# Altium PCB Fly-Balance.PcbDoc (part 2 of 2)
Units mil, origin at the board's own origin, x right, y up, seen from the top; angles counter-clockwise.
Board outline 1574.8 x 1574.8 mil, 2 copper layers (Top Layer, Bottom Layer); 114 components, 74 nets, 393 pads, 405 vias.
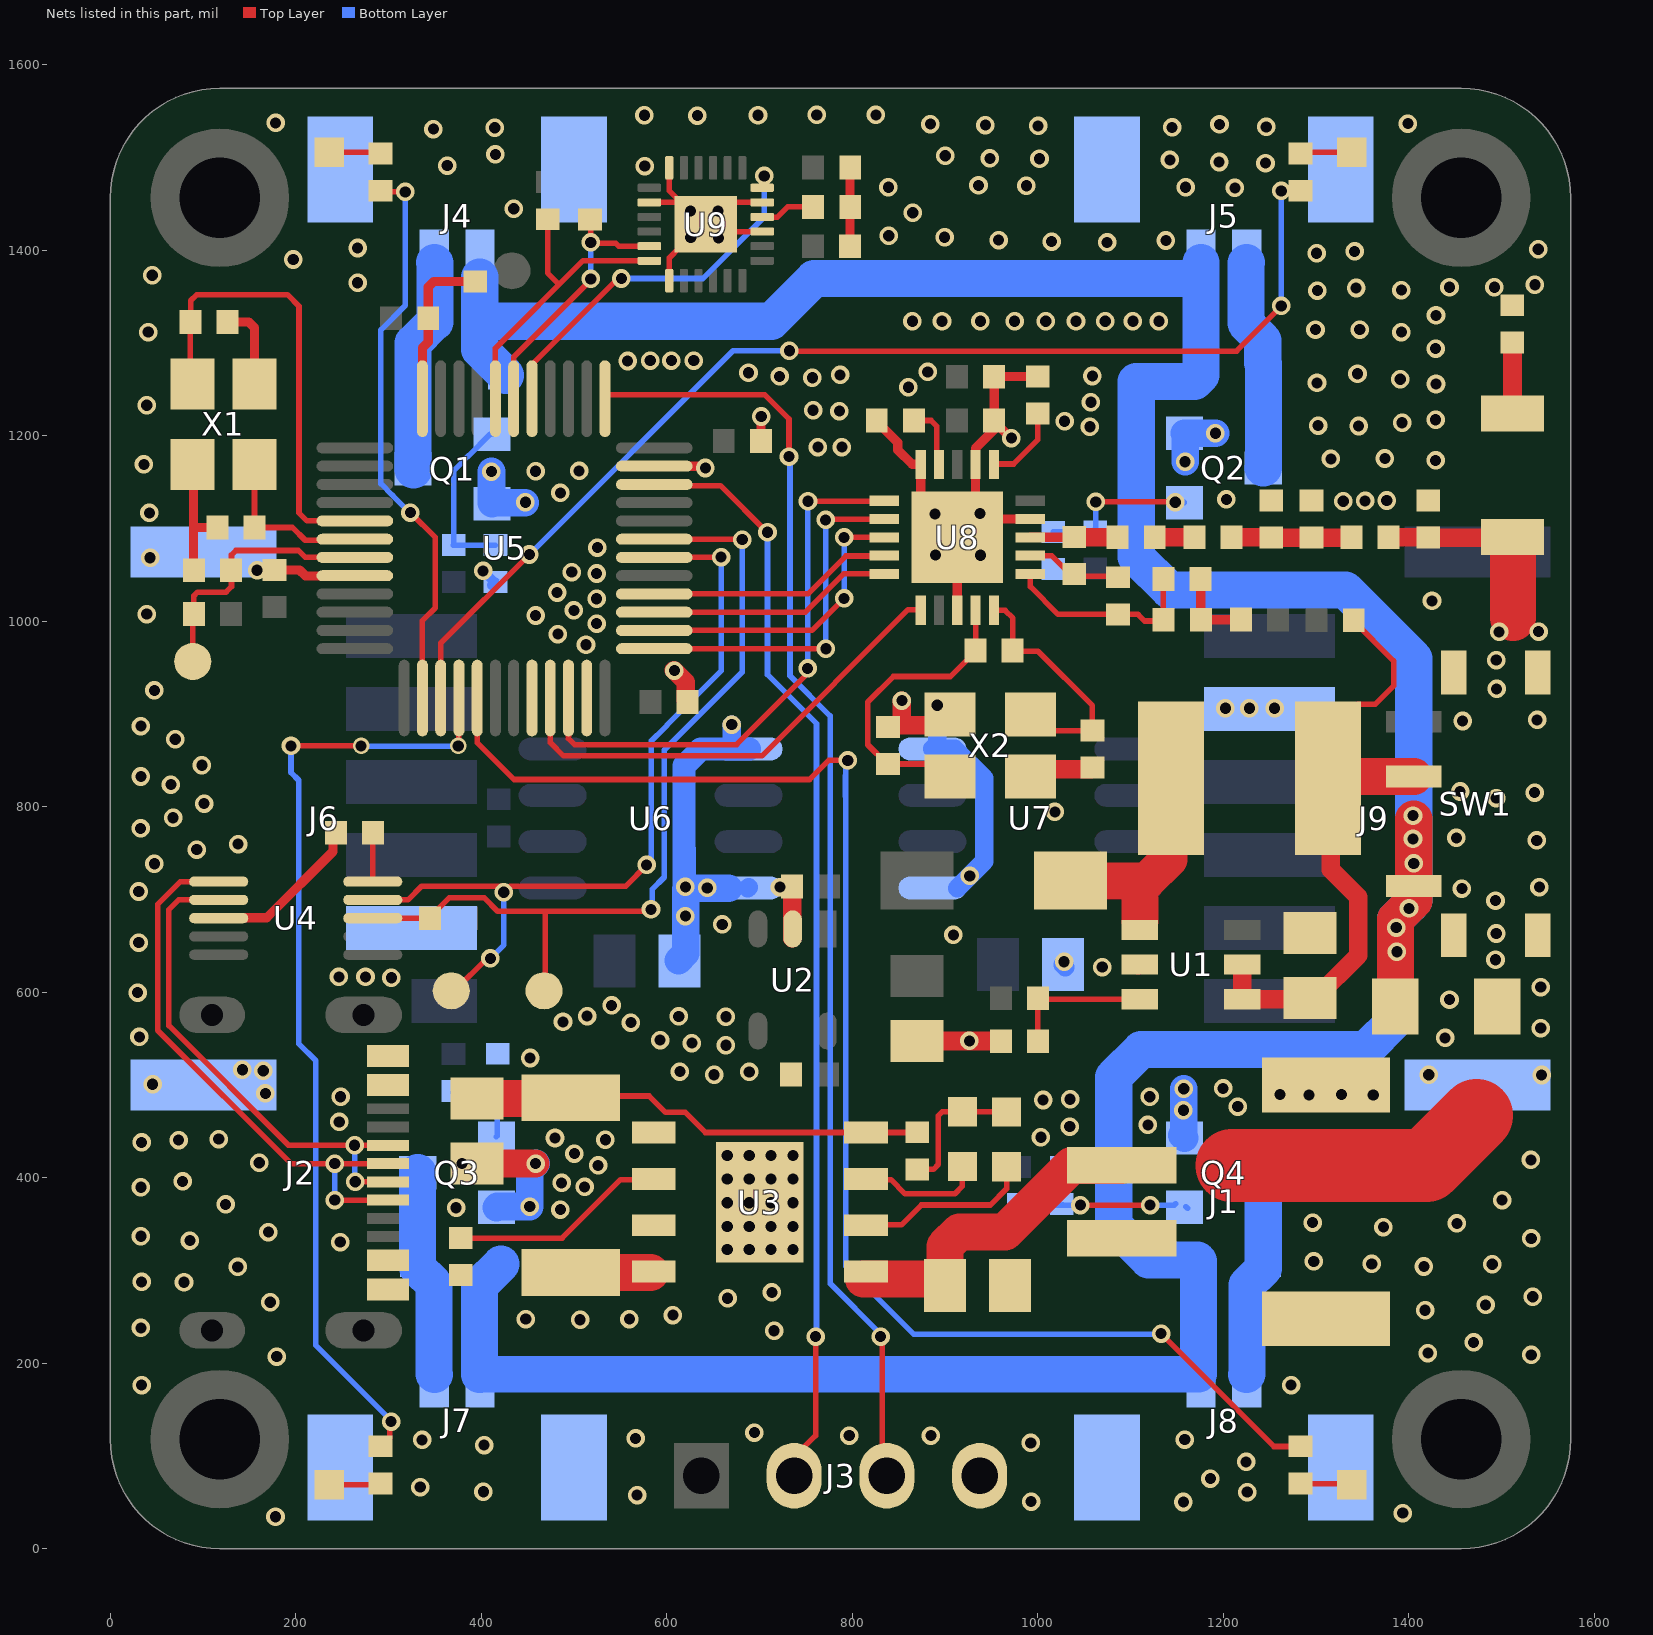
[diagram p2: the nets of this part, all layers, seen from the top]

## Via types
v1: diameter 20, hole 12, Top Layer to Bottom Layer, tented both sides, 403 vias
v2: diameter 18, hole 12, Top Layer to Bottom Layer, tented both sides, 2 vias

## Nets (pads, with @x,y where several pads share a name; then routed paths per layer and width w, separated by ;. In a path a pad name is that pad's centre, name@x,y a point inside that pad or via, vN(x,y) a via of type N, cw(c..) or ccw(c..) an arc to the next point about the centre after c; other vN are vias at no path point) (continued)
GND: ANT1.1 C1.2 C2.2 C3.2 C4.2 C5.2 C6.2 C7.2 C8.1 C9.1 C10.1 C11.1 C12.1 C13.1 C14.1 C17.2 C19.2 C23.1 C24.2 C25.2 C27.1 C28.2 C29.2 C30.1 C31.1 C32.2 C33.1 C34.2 J1.0 J1.1 J2.A1B12 J2.B1A12 J3.4 J4.0 J5.0 J6.2 J6.7 J6.8 J7.0 J8.0 J9.2 J9.8 L3.2 L5.1 L6.1 L6.2 Q1.2 Q2.2 Q3.2 Q4.2 R3.1 R4.1 R7.1 R9.2 R19.2 R20.2 R23.2 R24.2 R25.1 R26.2 SW1.0 U1.2 U2.2 U3.1 U3.3 U3.9 U4.3 U5.8 U5.20 U5.23 U5.35 U5.47 U6.5 U6.8 U7.5 U7.8 U8.8 U8.14 U8.17 U8.20 U8.21 U9.1 U9.9 U9.11 U9.18 U9.20 U9.25 X1.2 X1.4 X2.2 X2.4 | length 3118.8
  Top Layer w6: U9.20@581.3,1451.77 617.13,1451.77 U9.25@617.72,1451.18 ; U9.1@602.76,1367.32 602.9,1367.46 602.9,1392.07 613.98,1403.15 U9.25@614.57,1403.15 ; U9.18@602.76,1488.98 602.9,1488.83 602.9,1464.23 613.39,1453.74 U9.25@613.39,1452.76 ; U9.25@665.75,1418.9 667.13,1420.28 U9.9@702.95,1420.28 ; U9.25@669.69,1453.94 671.85,1451.77 U9.11@702.95,1451.77
  Top Layer w10: C14.1@88,1056 89.76,1057.76 X1.2@89.76,1167.72 ; X1.2@88.58,1169.29 X1.2@88.58,1179.13 ; 90,1101.18 C13.1@115.43,1101.18 ; U4.3@114.96,680.32 168.73,680.32 240.2,751.79 240.2,768.86 C7.2@243.39,772.05 ; U4.3@116.9,679.92 U4.3@117.09,680.11 ; C12.1@126.3,1322.83 149.21,1322.83 155.51,1316.54 X1.4@155.51,1256.3 ; X1.4@154.72,1245.28 154.72,1255.12 X1.4@155.51,1255.91 X1.4@155.91,1256.3 ; v1(158.27,1055.12) 158.43,1055.28 177.01,1055.28 C8.1@177.17,1055.43 204.02,1055.43 210.63,1048.82 210.68,1048.87 256.74,1048.87 U5.8@257.09,1049.21 ; U5.47@336.61,1240.16 336.61,1294.49 ; 336.61,1294.88 342.83,1301.1 C11.1@342.83,1326.77 ; C11.1@342.91,1326.77 342.91,1360.6 348.77,1366.46 R9.2@393.7,1366.46 ; U5.20@454.53,917.52 U5.20@454.72,917.32 ; U5.35@586.42,1167.52 U5.35@586.61,1167.32 639.76,1167.32 v1(641.73,1165.35) ; C10.1@701.5,1194.49 701.73,1194.72 701.73,1221.1 v1@701.57,1221.26 ; C32.2@797.95,1489.37 797.76,1489.17 797.76,1403.82 C33.1@798.03,1403.54 ; C23.1@825.59,1216.93 825.59,1216.42 849.27,1192.74 849.27,1184.76 864.78,1169.25 U8.20@873.99,1169.25 873.99,1133.83 U8.21@873.62,1133.46 ; U8.21@912.99,1049.21 913.39,1048.82 U8.8@913.39,1011.85 ; U8.17@933.09,1169.25 933.07,1186.68 953.94,1207.54 C24.2@953.94,1209.84 ; U8.17@933.09,1169.25 933.09,1127.94 U8.21@934.65,1126.38 ; U8.21@947.64,1110.63 948.02,1110.25 U8.14@992.09,1110.25 ; C24.2@951.97,1217.32 953.07,1218.43 C25.2@953.07,1263.78 ; C24.2@952.36,1216.54 952.36,1216.26 970.98,1197.64 v1(971.65,1197.64) ; C25.2@953.54,1263.78 953.7,1263.94 999.84,1263.94 R25.1@1000,1264.09 ; C29.2@1175.2,1001.97 1175.39,1001.77 C29.2@1175.71,1001.77 ; C28.2@1175.59,1046.06 1175.71,1045.94 C29.2@1175.71,1001.77 ; R4.1@1219.29,1001.97 1219.09,1001.77 C29.2@1175.71,1001.77
  Top Layer w20: v1@607.89,947.24 620.55,934.58 620.55,914.8 C9.1@622.05,913.31 ; C9.1@622.05,913.39 C9.1@622.05,913.31 ; C9.1@622.36,912.99 C9.1@622.05,913.31 ; C2.2@733.46,716.54 735.43,714.57 735.43,714.17 U2.2@735.43,658.27 ; v1(853.54,914.57) 853.54,887.95 893.07,887.95 X2.4@905.51,900.39 ; C1.2@870.08,547.68 870.3,547.46 959.63,547.46 R3.1@959.84,547.24 ; X2.4@905.51,899.61 X2.4@912.39,899.61 ; X2.2@988.58,830.32 X2.2@991.73,833.46 ; X2.2@996.46,839.37 997.48,840.39 1057.24,840.39 C31.1@1059.06,842.2 ; U1.2@1108.23,629.09 U1.2@1109.45,630.32 ; U1.2@1110.23,629.92 U1.2@1110.63,629.53 ; C4.2@1292.13,665.32 C4.2@1293.7,663.74 ; L3.2@1378.27,1090.55 L6.2@1421.65,1090.55 ; L6.2@1421.26,1090.24 1510.31,1090.24 ANT1.1@1511.02,1090.94
  Top Layer w30: C5.2@395.67,415.39 458.62,415.39 v1(458.66,415.35) ; X2.2@992.52,833.07 X2.2@993.7,834.25
  Top Layer w50: 1512.6,1003.94 ANT1.1@1512.6,1081.04
  Bottom Layer w10: v1(401.97,1054.33) 402.25,1054.33 414.37,1042.2 R19.2@415.35,1042.2 ; R19.2@411.1,1039.06 R19.2@411.42,1039.37 ; R19.2@411.42,1039.06 R19.2@412.4,1039.06
  Bottom Layer w20: v1(670.08,888.58) 670.08,865.8 673.48,862.4 U6.5@688.29,862.4 ; U6.8@687.4,712.2 U6.8@688.58,713.39 ; U7.8@886.52,862.4 U7.8@889.51,862.4 ; v1(891.73,909.45) 891.73,864.62 U7.8@889.51,862.4 ; U7.5@913.39,712.2 v1(926.77,725.59) 942.52,741.34 942.52,830.71 910.83,862.4 U7.8@889.51,862.4 ; C19.2@1027.13,629.92 C19.2@1029.88,627.17
  Bottom Layer w25: v1@619.29,712.2 618.85,712.65 618.85,754.18 618.74,754.28 618.74,844.33 636.61,862.2 U6.5@689.37,862.2 ; v1@620.47,711.02 v1@623.43,708.07
  Bottom Layer w30: v1(411.02,1161.42) 411.02,1127.54 Q1.2@411.59,1126.97 412.58,1127.95 v1@447.24,1127.95 ; Q3.2@416.52,368.11 417.3,368.9 v1(452.36,368.9) 452.36,408.66 v1@459.06,415.35 ; C17.2@612.6,634.25 620.47,642.13 v1@620.47,711.02 ; v1@623.43,708.07 627.56,712.2 U6.8@666.57,712.2 ; Q4.2@1155.29,445.91 Q4.2@1157.48,443.72 ; v1(1157.48,496.06) Q4.2@1157.48,443.72 ; Q4.2@1158.29,442.91 Q4.2@1157.48,443.72 ; v1(1159.06,1172.05) 1159.06,1201.99 Q2.2@1158.29,1202.76 v1(1191.73,1202.76)
  other v1: 178.15,34.45 1393.7,38.39 1157.09,50.39 992.91,50.79 568.11,57.87 402.36,61.42 1225.98,61.02 334.25,66.54 1186.22,75.59 1224.8,93.7 403.15,111.81 992.52,114.17 336.22,117.32 1158.66,117.72 566.54,118.9 796.85,122.05 884.84,122.05 694.49,125.2 33.86,176.38 1273.23,176.38 179.53,207.09 1532.28,209.06 1420.87,211.02 1470.08,222.44 715.75,235.04 33.07,238.19 506.69,246.85 448.03,247.64 559.84,247.64 606.69,251.97 1417.72,257.09 1483.07,262.99 172.44,265.75 665.75,270.08 1533.86,271.65 713.39,276.38 79.53,287.4 33.86,287.8 137.4,303.94 1416.54,304.33 1360.24,307.09 1490.16,306.69 1297.64,309.84 665.35,322.83 688.98,322.83 712.6,322.83 736.22,322.83 248.03,330.71 85.83,332.28 1532.28,334.65 33.07,337.01 170.47,341.34 665.35,347.44 688.98,347.44 712.6,347.44 736.22,347.44 1372.83,346.85 1296.46,351.57 1451.97,350.79 485.43,365.75 372.83,367.72 124.41,371.26 665.35,373.03 688.98,373.03 712.6,373.03 736.22,373.03 1500.79,375.98 33.07,389.76 511.42,390.16 486.61,394.49 77.95,396.06 665.35,398.62 688.98,398.62 712.6,398.62 736.22,398.62 525.98,413.39 379.13,415.35 160.63,416.14 1531.89,419.29 665.35,424.21 688.98,424.21 712.6,424.21 736.22,424.21 500.39,425.98 33.86,438.19 73.62,440.55 533.86,440.94 116.93,441.73 479.53,442.91 1003.54,443.7 1034.65,455.12 1118.9,457.09 246.85,460.24 1157.09,472.83 1215.75,476.77 1005.91,483.86 1035.04,484.65 248.43,487.4 1120.87,487.4 1292.52,489.37 1361.81,489.37 1261.42,489.76 1327.56,489.76 167.32,490.94 1200,496.46 45.67,500.79 651.18,511.02 1421.65,511.02 1543.31,510.83 614.17,514.57 688.98,514.17 164.96,515.35 142.52,516.54 452.76,529.13 663.78,542.91 627.17,545.28 592.91,548.43 926.38,547.64 1439.37,550.79 31.5,551.97 1542.52,561.42 561.42,567.32 488.19,568.11 514.17,574.41 612.99,574.02 663.78,573.62 540.55,585.83 1444.09,592.13 29.53,599.61 1542.52,605.51 246.46,616.54 275.2,616.54 303.15,615.75 1069.69,627.17 1028.54,632.87 1493.7,635.04 30.71,653.54 909.06,661.81 1494.49,663.39 659.84,673.23 620.08,682.09 1493.7,698.82 30.71,708.66 1457.48,711.81 620.08,713.58 643.7,712.6 722.05,713.39 1540.94,713.39 47.64,738.58 93.31,753.94 137.8,759.84 1538.19,763.78 1451.57,766.54 32.68,776.77 67.72,788.19 1018.5,794.49 101.18,803.54 1494.49,809.45 1535.83,815.35 1455.51,816.54 65.35,824.02 33.07,832.68 98.82,844.88 70.08,872.83 33.07,887.01 1458.27,892.52 1538.58,893.7 1202.36,906.3 1228.35,906.3 1255.51,906.3 47.64,925.59 1494.88,927.17 608.27,946.85 1494.49,958.27 512.99,974.8 482.68,986.22 1497.64,988.58 1540.16,988.98 524.41,997.64 458.66,1006.3 39.37,1007.87 500,1011.81 1425.2,1022.05 524.41,1024.41 481.89,1031.1 524.41,1051.57 497.64,1053.15 42.91,1068.5 938.19,1071.26 889.76,1071.65 525.2,1079.53 889.37,1115.75 937.8,1116.14 42.13,1116.93 447.64,1128.35 1329.53,1129.53 1353.15,1129.92 1376.38,1130.32 1203.54,1131.5 485.43,1138.58 458.66,1161.81 505.51,1162.2 36.22,1169.29 1429.13,1173.62 1316.14,1175.2 1374.41,1175.59 762.99,1187.8 788.98,1187.8 1056.3,1209.84 1302.36,1211.02 1346.06,1210.63 1392.91,1214.17 1029.13,1215.75 1429.13,1217.32 701.97,1220.87 757.87,1227.56 786.22,1226.77 39.37,1233.07 1057.48,1236.22 860.63,1252.36 1429.53,1255.91 1301.18,1257.09 1390.94,1261.02 757.09,1262.6 721.65,1264.17 1059.06,1264.57 787.01,1265.75 1344.88,1266.93 688.19,1268.11 881.5,1268.9 557.87,1280.71 582.28,1281.1 605.12,1281.1 629.13,1281.1 1429.13,1294.09 40.94,1311.81 1392.13,1311.81 1299.61,1314.57 1347.24,1314.57 864.96,1323.62 896.85,1323.62 938.19,1323.62 975.2,1323.62 1008.66,1323.62 1041.34,1323.62 1072.83,1323.62 1102.76,1323.62 1130.71,1323.62 1429.53,1329.92 1301.57,1356.69 1392.13,1357.09 1343.31,1359.45 1444.09,1360.24 1492.52,1360.24 1536.22,1362.99 266.73,1365.16 45.28,1373.23 197.24,1390.16 1300.79,1396.85 1341.73,1398.82 1539.76,1401.18 266.73,1402.56 1014.96,1409.45 1074.8,1408.66 957.87,1411.02 1138.19,1410.63 655.91,1413.39 625.98,1413.78 899.61,1414.17 839.37,1415.75 865.35,1440.55 625.59,1442.52 655.51,1442.52 435.04,1444.88 1212.6,1467.32 838.98,1468.11 1159.45,1468.11 936.22,1470.08 987.8,1469.69 363.39,1491.34 576.38,1490.94 1245.67,1494.09 1195.67,1495.28 1142.52,1497.64 948.43,1499.21 1001.97,1498.82 900.39,1501.97 415.35,1503.54 348.43,1530.71 414.57,1532.28 1144.88,1532.68 1246.46,1533.07 1000.39,1534.25 943.7,1535.04 884.25,1536.22 1196.06,1535.83 178.35,1537.4 1399.21,1536.61 633.07,1545.28 575.98,1545.67 698.43,1545.67 761.81,1546.06 825.59,1546.06
I2C_SCL: R10.1 U5.42 U9.23 | length 283.6
  Top Layer w6: U5.42@435.04,1240.16 435.04,1285.04 518.11,1368.11 v1@518.11,1368.5 ; R10.1@517.32,1428.43 518.5,1427.24 518.11,1426.85 v1(518.11,1408.66) ; v1@518.9,1408.27 519.69,1407.48 545.28,1407.48 548.23,1404.53 U9.23@581.3,1404.53 U9.23@580.71,1405.12
  Bottom Layer w6: v1@517.72,1404.72 518.11,1404.33 v1(518.11,1369.29)
I2C_SDA: R11.1 U5.43 U9.24 | length 335.1
  Top Layer w6: U5.43@414.96,1239.37 415.35,1239.76 U5.43@415.35,1240.16 415.35,1294.49 509.84,1388.98 581.1,1388.98 U9.24@581.3,1388.78 ; R11.1@471.65,1433.54 471.65,1375.59 483.46,1363.78
LED_LB: R15.1 U5.16 | length 1038.4
  Top Layer w6: v1(194.88,865.75) v2(270.47,865.75) ; R15.1@291.34,110.55 292.32,110.55 301.13,119.36 301.13,134.2 v1@303.15,136.22 ; v2(375.2,865.75) 375.59,866.14 375.59,916.93 U5.16@375.98,917.32 U5.16@376.18,917.13
  Bottom Layer w6: v1(194.88,865.75) 194.88,837.01 203.25,828.64 203.25,651.58 203.15,651.48 203.15,544.71 221.65,526.2 221.65,219.29 285.83,155.12 285.83,155.06 303.15,137.74 v1@303.15,136.22 ; v2(270.47,865.75) 271.66,865.75 272.05,865.35 374.8,865.35 v2(375.2,865.75)
  other v1: 302.76,137.01
LED_LF: R13.1 U5.14 | length 609.3
  Top Layer w6: R13.1@292.91,1465.35 292.52,1464.96 294.49,1462.99 v1(318.11,1462.99) ; v1@324.02,1118.11 324.02,1116.93 350.5,1090.45 350.5,1014.67 336.61,1000.79 U5.14@336.61,917.32
  Bottom Layer w6: v1(318.11,1462.99) 318.11,1340.55 291.73,1314.17 291.73,1148.5 304.41,1135.83 304.41,1135.75 318.35,1121.81 319.84,1121.81 v1@319.69,1121.65
  other v1: 323.62,1117.32
LED_RB: R16.1 U5.17 | length 1592
  Top Layer w6: U5.17@395.67,917.32 395.67,869.3 435.54,829.42 753.98,829.42 774.56,850 v1(795.27,850) ; v1(1133.07,231.89) 1254.72,110.24 R16.1@1284.65,110.24
  Bottom Layer w6: v1(795.27,850) 792.98,847.7 792.98,833.63 792.81,833.46 792.81,811.52 792.91,811.42 792.91,304.72 866.54,231.1 1132.28,231.1 v1(1133.07,231.89)
LED_RF: R14.1 U5.15 | length 1259.3
  Top Layer w6: U5.15@356.3,917.32 356.3,976.38 v1(451.97,1072.05) ; v1(732.28,1291.73) 732.68,1291.34 1214.57,1291.34 1262.6,1339.37 v1(1262.6,1340.16) ; v1(1262.6,1464.17) R14.1@1281.5,1464.17
  Bottom Layer w6: v1(451.97,1072.05) 671.65,1291.73 v1(732.28,1291.73) ; v1(1262.6,1340.16) v1@1262.6,1463.78
MPU_INT: U5.41 U9.12 | length 386.4
  Top Layer w6: U5.41@454.33,1255.12 454.33,1276.59 546.74,1369 549.61,1366.14 v1@545.28,1366.14
  Bottom Layer w6: v1(551.18,1369.69) 639.07,1369.69 705.12,1435.73 v1(705.12,1480.32)
NetANT1_2: ANT1.2 R26.1 | length 77
  Top Layer w20: ANT1.2@1512,1224.27 R26.1@1512,1301
  Top Layer w25: ANT1.2@1511.81,1224.08 ANT1.2@1512,1224.27
NetC4_1: C4.1 L1.1 R2.2 SW1.2 U1.4 U1.5 | length 646.1
  Top Layer w6: L1.1@1338.19,903.54 1345.03,910.39 1363.93,910.39 1383.86,930.32 1383.86,957.2 1340.87,1000.2 R2.2@1340.87,1001.18
  Top Layer w10: L1.1@1315.75,856.3 L1.1@1315.75,880.71
  Top Layer w20: U1.4@1220.47,592.52 U1.5@1220.47,629.92 ; U1.4@1233.46,592.52 1294.88,592.52 1295.28,592.91 1301.14,592.91 C4.1@1303.15,594.92 ; C4.1@1293.7,593.74 1299.61,593.74 1345.67,639.8 1345.67,702.76 1316.14,732.28 1316.14,828.35 L1.1@1312.99,831.5
  Top Layer w40: L1.1@1313.78,833.07 1314.17,832.68 SW1.2@1405.51,832.68
NetC7_1: C7.1 U4.10 | length 52.5
  Top Layer w6: U4.10@283.1,719.71 283.1,771.76 C7.1@283.39,772.05
NetC15_2: C15.2 D2.1 J4.1 Q1.3 | length 233.3
  Bottom Layer w40: Q1.3@326.77,1163.39 326.52,1163.64 D2.1@326.52,1263.78 326.52,1299.94 C15.2@349.41,1322.83 ; J4.1@349.42,1386.81 350,1386.22 C15.2@350,1322.83
NetC16_2: C16.2 D3.1 J5.2 Q2.3 | length 227.2
  Bottom Layer w40: C16.2@1224.8,1321.65 1224.8,1386.22 J5.2@1225.39,1386.81 ; C16.2@1225.98,1319.69 1236.42,1309.25 ; 1236.22,1309.45 1242.74,1302.93 1242.74,1278.79 1243.31,1278.22 Q2.3@1243.29,1165.35
NetC20_2: C20.2 D4.1 J7.2 Q3.3 | length 221.7
  Bottom Layer w40: D4.1@331.1,304.33 331.1,303.15 349.21,285.04 C20.2@349.21,253.15 ; D4.1@331.1,306.69 331.1,405.1 Q3.3@331.52,405.51 ; C20.2@349.21,251.97 349.21,188.2 J7.2@349.42,188
NetC21_2: C21.2 D5.1 J8.1 Q4.3 | length 223.4
  Bottom Layer w40: J8.1@1225.39,188 1225.59,188.2 C21.2@1225.59,257.09 ; C21.2@1225.59,258.66 1225.59,284.39 1243.31,302.11 D5.1@1243.31,312.2 ; D5.1@1243.29,312.22 Q4.3@1243.29,405.51
NetC23_2: C23.2 U8.19 | length 69.1
  Top Layer w6: C23.2@866.46,1216.54 885.04,1216.54 891.34,1210.24 891.34,1170.87 U8.19@892.91,1169.29
NetC26_1: C26.1 L2.2 | length 43.1
  Top Layer w20: L2.2@1126.3,1090.55 1168.34,1090.55 ccw(c1168.34,1091.9) C26.1@1169.29,1090.94
NetC26_2: C26.2 C27.2 L3.1 L5.2 | length 129.8
  Top Layer w20: C26.2@1208.98,1090.55 1250.85,1090.55 ccw(c1250.85,1093.24) C27.2@1252.76,1091.34 ; C27.2@1251.97,1090.24 1294.57,1090.24 L5.2@1296.06,1091.73 ; L5.2@1295.28,1090.24 1335.08,1090.24 cw(c1335.08,1088.62) L3.1@1336.22,1089.76
NetC28_1: C28.1 C29.1 L7.2 U8.11 | length 217.6
  Top Layer w6: U8.11@992.13,1051.57 992.13,1037.4 1021.97,1007.56 L7.2@1086.61,1007.56 1108.19,1007.56 1115.35,1000.39 1134.25,1000.39 C29.1@1135.83,1001.97 ; C29.1@1135.43,1001.97 1135.51,1002.05 C28.1@1135.51,1045.67
NetC30_2: C30.2 R27.1 U8.9 X2.1 | length 316.3
  Top Layer w6: X2.1@895.67,846.46 895.35,846.14 C30.2@838.58,846.14 837.6,846.14 816.79,866.95 816.79,912.85 844.49,940.55 905.79,940.55 932.28,967.05 R27.1@932.28,969.69 ; R27.1@933.09,969.7 U8.9@933.09,1011.85
NetC31_2: C31.2 R27.2 U8.10 X2.3 | length 270.3
  Top Layer w6: U8.10@952.79,1011.85 964.92,1011.85 973.23,1003.54 R27.2@973.23,969.29 ; R27.2@972.44,967.72 1000.39,967.72 1059.06,909.06 C31.2@1059.06,882.2 1008.74,882.2 X2.3@991.73,899.21
NetC34_1: C34.1 U9.10 | length 59.3
  Top Layer w6: U9.10@703.15,1435.83 719.29,1435.83 730.32,1446.85 C34.1@757.87,1446.85
NetD1_1: D1.1 L1.2 U1.1 | length 248.1
  Top Layer w40: D1.1@1037.4,720.47 1037.8,720.08 1117.91,720.08 ; U1.1@1110.24,677.17 1110.24,712.41 1117.91,720.08 ; L1.2@1143.7,830.71 1141.34,828.35 1141.34,743.51 1117.91,720.08
NetL2_1: L2.1 L4.2 U8.13 | length 94.4
  Top Layer w10: U8.13@992.24,1090.71 U8.13@992.09,1090.55 1038.42,1090.55 cw(c1038.42,1089.21) L4.2@1039.37,1090.16 ; L4.2@1039.21,1090.71 L4.2@1039.37,1090.55
  Top Layer w20: L4.2@1039.37,1090.87 1085.51,1090.87 L2.1@1085.83,1090.55
NetL4_1: L4.1 L7.1 U8.12 | length 104.1
  Top Layer w6: U8.12@992.09,1070.85 1014.99,1070.87 ; 1014.98,1070.85 1035.43,1050.39 L4.1@1038.98,1050.39 ; L4.1@1039.37,1050.87 1041.81,1048.43 L7.1@1087.01,1048.43
NetLED1_1: LED1.1 LED2.1 R6.1 | length 152.2
  Top Layer w6: R6.1@870.08,409.13 887.48,409.13 892.91,414.57 892.91,466.93 897.24,471.26 LED2.1@918.9,471.26 965.35,471.26 LED1.1@965.75,470.87
NetLED1_2: LED1.2 U3.6 | length 191.3
  Top Layer w6: U3.6@814.96,349.21 853.15,349.21 874.61,370.68 949.02,370.68 966.54,388.19 LED1.2@966.54,411.81
NetLED2_2: LED2.2 U3.7 | length 134.9
  Top Layer w6: U3.7@814.96,398.82 815.75,398.03 841.73,398.03 857.09,382.68 910.63,382.68 918.9,390.94 LED2.2@918.9,411.81
NetLED3_2: LED3.2 R13.2 | length 54.7
  Top Layer w6: LED3.2@236.22,1505.91 289.76,1505.91 R13.2@290.55,1505.12
NetLED4_2: LED4.2 R14.2 | length 55.3
  Top Layer w6: R14.2@1283.46,1506.3 1283.86,1505.91 LED4.2@1338.58,1505.91
NetLED5_2: LED5.2 R15.2 | length 53.1
  Top Layer w6: LED5.2@236.22,68.9 288.19,68.9 R15.2@288.98,69.69
NetLED6_2: LED6.2 R16.2 | length 56.5
  Top Layer w6: R16.2@1283.46,70.55 1283.94,70.08 LED6.2@1339.76,70.08
NetQ1_1: Q1.1 R17.1 R19.1 | length 184
  Bottom Layer w6: R17.1@369.69,1081.89 370,1082.2 R17.1@370.47,1082.2 R19.1@415.35,1082.2 ; R17.1@370.47,1082.68 370.47,1162.8 385.96,1178.29 386.11,1178.29 409.59,1201.77 Q1.1@411.59,1201.77 Q1.1@412.4,1201.77
NetQ2_1: Q2.1 R18.1 R20.1 | length 172.7
  Top Layer w6: v1(1062.6,1128.74) 1148.03,1128.74 v1(1148.43,1128.35)
  Bottom Layer w6: R20.1@1016.93,1096.38 1061.89,1096.38 R18.1@1062.6,1095.67 ; v1@1062.13,1131.18 v1@1063.39,1129.92 ; R18.1@1062.2,1100 1062.6,1100.39 v1(1062.6,1128.74) ; v1(1148.43,1128.35) 1157.89,1128.35 Q2.1@1158.29,1127.95
NetQ3_1: Q3.1 R21.1 R23.1 | length 98
  Bottom Layer w6: R21.1@369.69,492.13 371.34,493.78 R23.1@417.72,493.78 ; R23.1@414.17,491.73 R23.1@414.96,490.94 ; Q3.1@416.14,444.09 417.32,445.28 R23.1@417.32,491.81
NetQ4_1: Q4.1 R22.1 R24.1 | length 172.8
  Top Layer w6: v1(1046.06,370.47) v1(1121.26,370.47)
  Bottom Layer w6: R22.1@979.92,370.08 980.32,370.47 1026.77,370.47 1027.17,370.87 1027.56,370.47 v1(1046.06,370.47) ; v1(1121.26,370.47) 1147.24,370.47 Q4.1@1148.82,372.05 ; Q4.1@1159.84,368.9 Q4.1@1161.81,366.93
NetR1_1: R1.1 R3.2 U1.3 | length 155.9
  Top Layer w6: R3.2@1000.32,547.24 1000.32,593.62 R1.1@1000.39,593.7 ; R1.1@1001.18,593.31 1001.97,592.52 U1.3@1110.23,592.52
NetR5_1: R5.1 U3.4 | length 85.9
  Top Layer w40: R5.1@496.46,297.99 U3.4@582.34,297.99
NetR7_2: R7.2 U3.2 | length 234.7
  Top Layer w6: R7.2@377.95,334.96 487.32,334.96 550.39,398.03 584.25,398.03 U3.2@585.83,399.61
NetR25_2: R25.2 U8.16 | length 86
  Top Layer w6: U8.16@953.15,1169.69 974.02,1169.69 1000,1195.67 R25.2@1000,1224.09
NRF_CE: U5.22 U8.1 | length 604.6
  Top Layer w6: U5.22@494.09,917.32 494.09,873.62 500.73,866.98 675.35,866.98 751.97,943.6 v1(751.97,949.21) ; v1(752.36,1129.53) 834.26,1129.53 U8.1@834.69,1129.95
  Bottom Layer w6: v1(751.97,949.21) 752.26,949.5 752.26,1129.43 v1(752.36,1129.53)
NRF_IRQ: U5.21 U8.6 | length 519.2
  Top Layer w6: U5.21@474.41,917.32 474.41,869.3 488.72,854.98 702.62,854.98 860.24,1012.6 U8.6@874.41,1012.6
NRST: C14.2 R12.1 T2.1 U5.7 | length 289.6
  Top Layer w6: T2.1@90.55,956.69 88.98,958.27 88.98,1006.61 R12.1@90.24,1007.87 R12.1@90.24,1007.87 90.16,1027.56 94.09,1031.5 124.8,1031.5 130.71,1037.4 130.71,1054.65 C14.2@130.24,1055.12 ; C14.2@129.92,1055.12 130.71,1055.91 130.71,1071.65 135.43,1076.38 202.87,1076.38 210.35,1068.9 U5.7@263.78,1068.9
SPI_MISO: U5.27 U8.5 | length 264.6
  Top Layer w6: U5.27@587.4,1009.45 587.8,1009.84 749.51,1009.84 790.82,1051.15 U8.5@834.69,1051.15
SPI_MOSI: U5.28 U8.4 | length 266.3
  Top Layer w6: U5.28@586.61,1029.53 752.22,1029.53 793.17,1070.47 835.43,1070.47 U8.4@835.83,1070.87
SPI_NSS: U5.25 U8.2 | length 387.7
  Top Layer w6: U5.25@587.01,970.08 587.4,970.47 v1(771.65,970.47) ; v1(771.26,1109.45) 771.66,1109.85 834.28,1109.85 U8.2@834.69,1110.25
  Bottom Layer w6: v1(771.26,1109.45) 771.65,1109.06 v1(771.65,970.47)
SPI_SCK: U5.26 U8.3 | length 328.3
  Top Layer w6: U5.26@586.61,989.76 587.01,990.16 756.69,990.16 v1(791.34,1024.8) ; v1(791.34,1090.55) U8.3@834.69,1090.55
  Bottom Layer w6: v1(791.34,1024.8) v1(791.34,1090.55)
SWD_CLK: J3.3 U5.37 | length 1401.2
  Top Layer w6: U5.37@533.46,1240.16 533.46,1248.03 537.01,1244.49 705.61,1244.49 731.89,1218.21 v1(731.89,1177.56) ; v1(830.71,228.74) 832.21,227.24 832.21,85.12 J3.3@837.8,79.53
  Bottom Layer w6: v1(731.89,1177.56) 732.97,1176.48 732.97,941.34 776.27,898.04 776.27,842.13 776.38,842.02 776.38,285.83 830.71,231.5 v1(830.71,228.74)
SWD_IO: J3.2 U5.34 | length 1197.9
  Top Layer w6: U5.34@586.61,1147.64 587.9,1146.35 657.98,1146.35 708.27,1096.06 v1(708.66,1096.06) ; J3.2@737.01,78.35 737.01,98.43 760.63,122.05 v1(760.63,228.74) ; J3.2@755.31,96.65 J3.2@758.66,93.31
  Bottom Layer w6: v1(708.66,1096.06) 708.66,942.52 761.52,889.66 761.52,229.63 v1(760.63,228.74)
UART_RX: R8.1 T4.1 U4.8 U5.31 | length 936.8
  Top Layer w6: U4.8@283.1,679.92 R8.1@344.09,679.92 ; R8.1@344.09,680.32 344.09,680.43 365.38,701.72 403.4,701.72 417.72,687.4 580.71,687.4 v1@582.68,689.37 ; R8.1@344.33,679.69 R8.1@344.49,679.53 ; R8.1@344.57,678.94 R8.1@344.57,679.92 ; T4.1@468.11,601.18 T4.1@467.72,601.57 468.9,602.76 468.9,687.01 ; U5.31@586.61,1088.58 586.81,1088.39 681.3,1088.39 v1(681.5,1088.19)
  Bottom Layer w6: v1@584.25,689.76 584.25,710.92 597.35,724.02 597.35,744.88 597.35,745.27 597.24,745.37 597.24,861.02 681.5,945.28 v1(681.5,1088.19)
  other v1: 583.07,689.37
UART_TX: T3.1 U4.9 U5.30 | length 892.1
  Top Layer w6: U4.9@283.46,699.61 320.87,699.61 335.83,714.57 v1@424.35,714.57 ; T3.1@360.56,601.57 T3.1@366.93,601.57 ; T3.1@366.93,600.79 T3.1@366.93,601.57 ; T3.1@366.93,602.76 T3.1@366.93,601.57 ; T3.1@367.91,601.77 T3.1@367.72,601.57 T3.1@366.93,601.57 ; T3.1@368.11,602.76 372.44,602.76 406.3,636.61 v1(409.84,636.61) ; v1(424.35,707.86) 431.06,714.57 555.91,714.57 v1@578.35,737.01 ; U5.30@586.61,1068.9 586.81,1069.09 658.46,1069.09 v1(658.66,1069.29)
  Bottom Layer w6: v1(409.84,636.61) 424.35,651.13 v1(424.35,707.86) ; v1(578.35,737.4) 583.46,742.52 583.46,871.26 588.19,875.98 ; 588.78,876.57 600.64,888.43 600.64,888.58 658.66,946.6 v1(658.66,1069.29)
USB_DN: J2.A7 J2.B7 U4.2 | length 548.7
  Top Layer w6: U4.2@117.32,700 U4.2@116.9,699.62 73.62,699.61 63.12,689.1 63.12,564.05 192.12,435.04 v1(263.39,435.04) J2.B7@299.61,435.04 ; v1(264.17,395.67) J2.A7@299.61,395.67
  Bottom Layer w6: v1@263.78,435.04 263.78,396.06 v1(264.17,395.67)
USB_DP: J2.A6 J2.B6 U4.1 | length 616.7
  Top Layer w6: U4.1@116.9,719.32 75.62,719.32 51.12,694.82 51.12,559.08 194.84,415.35 v1(242.13,415.35) 299.21,415.35 J2.A6@299.61,415.75 ; v1(242.13,375.98) J2.B6@299.61,375.98
  Bottom Layer w6: v1(242.13,375.98) v1(242.13,415.35)
VBAT: C6.1 F1.2 J1.2 U3.5 | length 643.5
  Top Layer w40: U3.5@812,291 897.77,291 C6.1@900,288.77 ; C6.1@900,284 C6.1@900,288.77 ; J1.2@1090.55,413.39 1036.61,413.39 964.91,341.68 915.68,341.68 900,326 C6.1@900,288.77
  Top Layer w78.74: 1209.45,413.39 1419.33,413.39 1473.05,467.11
VBATT: C15.1 C16.1 C20.1 C21.1 D2.2 D3.2 D4.2 D5.2 F1.1 J4.2 J5.1 J7.1 J8.2 SW1.1 | length 3865.1
  Top Layer w40: F1.1@1385.83,587.8 1385.83,587.4 1387.4,588.98 1385.83,590.55 1385.83,678.74 1405.51,698.42 SW1.1@1405.51,714.57 v1@1405.51,786.68
  Bottom Layer w40: J4.2@398.43,1371.36 C15.1@398.43,1323.62 ; D4.2@421.52,307.09 398.03,283.6 398.03,188 J7.1@398.62,188 1173.43,188.39 1173.43,307.09 1173.43,310.03 1172.05,311.42 1119.69,311.42 1082.03,349.07 1082.03,355.53 1082.06,385.38 ; D2.2@426.38,1265.35 398.43,1293.31 C15.1@398.43,1323.62 ; 1082.03,385.42 1082.03,508.8 1111.42,538.19 1353.94,538.19 1385.83,570.08 1385.83,678.74 v1@1401.97,694.88 ; J5.1@1174.8,1369.69 1174.58,1369.46 758.83,1369.46 712.99,1323.62 C15.1@398.43,1323.62 ; J5.1@1176.19,1386.81 1176.19,1265.54 1169.3,1258.66 1106.3,1258.66 1106.3,1069.29 1141.72,1033.87 1331.64,1033.87 1405.51,960 v1(1405.51,738.98) v1@1405.51,698.82
  other v1: 1387.4,643.7 1386.61,669.69 1400.39,690.55 1404.72,765.35 1404.72,790.55
VUSB: C5.1 J2.A4B9 J2.B4A9 R5.2 R6.2 U3.8 | length 479.1
  Top Layer w6: R5.2@504.33,488.19 581.1,488.19 598.82,470.47 620.08,470.47 641.73,448.82 U3.8@814.96,448.82 R6.2@869.69,448.82
  Top Layer w40: C5.1@395.67,485.39 490.92,485.39 ccw(c490.92,488.22) R5.2@492.91,486.22
XTAL_IN: C12.2 U5.5 X1.1 | length 499.8
  Top Layer w6: X1.1@85.04,1258.27 86.3,1259.53 C12.2@86.3,1322.83 ; C12.2@85.83,1322.83 86.61,1323.62 86.61,1345.67 93.31,1352.36 190.94,1352.36 203.54,1339.76 203.54,1116.93 212.2,1108.27 U5.5@263.78,1108.27
XTAL_OUT: C13.2 U5.6 X1.3 | length 183
  Top Layer w6: C13.2@155.12,1101.18 C13.2@155.51,1101.18 ; X1.3@155.51,1169.29 C13.2@155.51,1101.18 ; U5.6@263.78,1088.58 262.67,1087.47 216.31,1087.47 216.24,1087.4 210.24,1087.4 196.46,1101.18 C13.2@155.51,1101.18
pads on no net: HOLE1.1 HOLE2.1 HOLE3.1 HOLE4.1 J2.A5 J2.A8 J2.B5 J2.B8 J2.EP J9.7 SW1.3 U1.6 U2.4 U4.4 U4.5 U4.6 U5.2 U5.3 U5.4 U5.19 U5.29 U5.38 U5.45 U5.46 U9.2 U9.3 U9.4 U9.5 U9.6 U9.7 U9.14 U9.15 U9.16 U9.17 U9.19 U9.21 U9.22

## Polygon pours and split planes (outlines as drawn)
no net on Top Overlay (solid, remove dead copper): 0,1574.8
GND on Bottom Layer (solid, remove dead copper, pour order 150): 0,1574.8 1574.8,1574.8 1574.8,0 0,0
GND on Top Layer (solid, remove dead copper, pour order 152): 0,1574.8 1574.8,1574.8 1574.8,0 0,0

## Keep-outs
Keep-Out Layer:
  the board outline again, w5

## Other copper
Top Layer:
  region net VBAT: 1470.47,562.2 1470.47,550.31 cw(c1396.54,550.31) 1448.82,498.03 1503.94,442.91 1504.33,443.31 ccw(c1465.36,482.28) 1520.47,482.28 1520.47,562.2
  region net VBAT: 1137.8,432.68 1147.64,432.68 ccw(c1147.64,438.38) 1151.67,434.35 1156.3,438.98 cw(c1189.57,405.71) 1189.57,452.76 1211.81,452.76 1211.81,374.02 1188.58,374.02 cw(c1188.58,414.89) 1159.68,385.99 1158.27,387.4 ccw(c1143.06,372.19) 1143.06,393.7 1137.8,393.7
  region net VUSB: 319.69,322.83 325.1,322.83 ccw(c325.1,326.87) 327.95,324.02 ccw(c318.45,333.52) 331.89,333.52 331.89,481.7 ccw(c323.82,481.7) 329.53,487.4 ccw(c327.63,485.5) 327.63,488.19 319.29,488.19 319.29,511.81 344.46,511.81 cw(c344.46,505.09) 349.21,509.84 ccw(c353.96,514.59) 353.96,507.87 376.38,507.87 376.38,462.99 363.12,462.99 ccw(c363.12,452.24) 355.51,459.84 ccw(c357.41,457.94) 354.72,457.94 354.72,305.87 cw(c345.32,305.87) 351.97,299.21 319.69,299.21
  pour cut-out: 1270.67,1113.19 1270.67,1066.93 1448.82,1066.93 1448.82,1113.19
Multi-Layer:
  pour cut-out: 1448.82,1338.58 1448.82,1003.94 1574.8,1003.94 1574.8,1338.58

## Silkscreen, mask and mechanical layers (free items; w line width, h text height)
Top Overlay:
  region: 1394.4,736.4 1373.3,757.5 1387,757.5 1387,802.5 1401.92,802.5 1401.92,757.5 1415.5,757.5
  region: 1251.97,1252.95 1181.1,1417.32 1115.16,1252.95 1181.1,1318.9
  text "孔乙己 Fly-Balance" at 393.7,157.48 h98.43
  text "Rev.D" at 1014.76,66.93 h60
Bottom Overlay:
  text "3.3V" at 668.31,125 h60 r315
  text "DIO" at 761.81,125 h60 r315
  text "CLK" at 866.14,119.09 h60 r315
  text "GND" at 969.49,118.11 h60 r315
Mechanical 1:
  the board outline again, w5
Drill Drawing:
  text ".Legend" at 1769.69,-56.1 h60